# EAGLE board HapticSleeveSchematic4 (EAGLE 9.6.2)
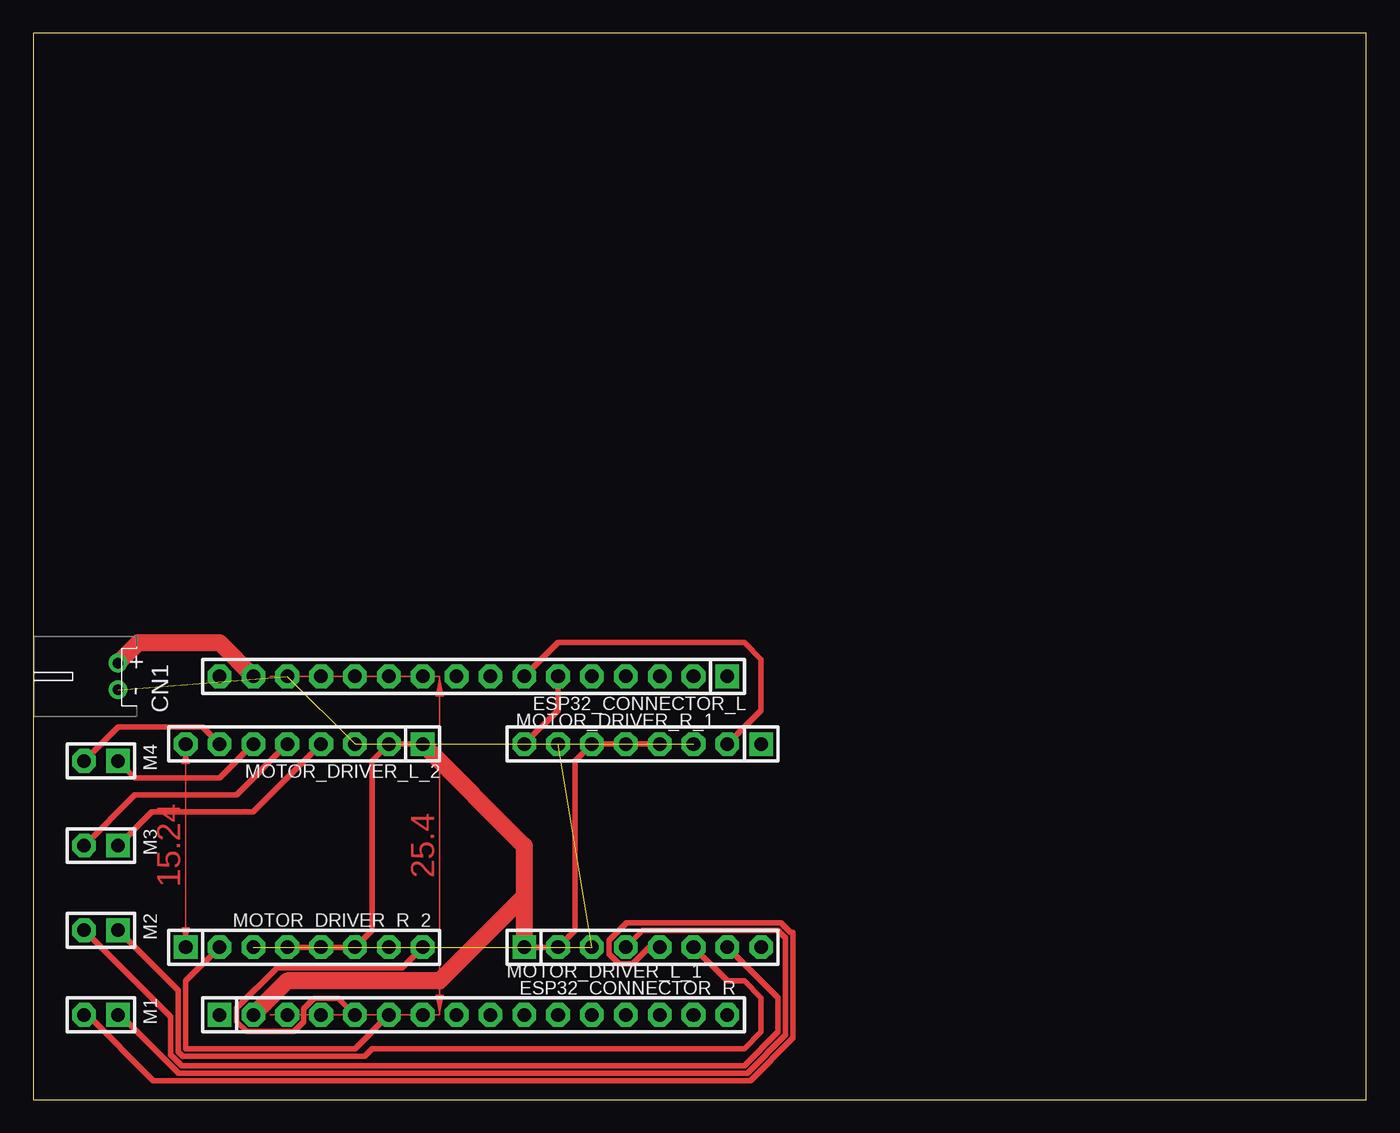
[diagram p0: board, top side]

Size 100 x 80 mm. Coordinates in mm from the lower left corner, seen from the top.
Outline: 0,0 100,0 100,80 0,80 0,0
Copper layers (1*16): Top 0.035mm / dielectric 1.5mm / Bottom 0.035mm
Design rules "default": minimum track width 6mil, minimum drill 0.35mm, track to track 6mil, track to pad 6mil, pad to pad 6mil, via to via 6mil, smd to smd 6mil, copper to edge 40mil, drill to drill 6mil, minimum pad ring 10mil, minimum via ring 8mil, stop-mask expansion 4mil, vias tented up to drill 0mil, thermal gap 10mil

## Footprints (pad centres in the part's own frame; a part is rotated, then mirrored left to right if it is on the bottom)
JST-PH-2-THM-RA = drill 0.8 pad 1.422: 1 1,0; 2 -1,0
SIP-100-16-40 = drill 1.016 pad 1.778 square: 1 -19.05,0 | drill 1.016 pad 1.778 octagon: 2 -16.51,0; 3 -13.97,0; 4 -11.43,0; 5 -8.89,0; 6 -6.35,0; 7 -3.81,0; 8 -1.27,0; 9 1.27,0; 10 3.81,0; 11 6.35,0; 12 8.89,0; 13 11.43,0; 14 13.97,0; 15 16.51,0; 16 19.05,0
SIP-100-02-40 = drill 1.016 pad 1.778 square: 1 -1.27,0 | drill 1.016 pad 1.778 octagon: 2 1.27,0
SIP-100-08-40 = drill 1.016 pad 1.778 square: 1 -8.89,0 | drill 1.016 pad 1.778 octagon: 2 -6.35,0; 3 -3.81,0; 4 -1.27,0; 5 1.27,0; 6 3.81,0; 7 6.35,0; 8 8.89,0

## Placement (x,y rotation side)
CN1  [JST-PH-2-THM-RA]  6.35,31.75 90 top
ESP32_CONNECTOR_L  F-1X16-SIP-100-40  [SIP-100-16-40]  33.02,31.75 180 top
ESP32_CONNECTOR_R  F-1X16-SIP-100-40  [SIP-100-16-40]  33.02,6.35 0 top
M1  F-1X02-SIP-100-40  [SIP-100-02-40]  5.08,6.35 180 top
M2  F-1X02-SIP-100-40  [SIP-100-02-40]  5.08,12.7 180 top
M3  F-1X02-SIP-100-40  [SIP-100-02-40]  5.08,19.05 180 top
M4  F-1X02-SIP-100-40  [SIP-100-02-40]  5.08,25.4 180 top
MOTOR_DRIVER_L_1  F-1X08-SIP-100-40  [SIP-100-08-40]  45.72,11.43 0 top
MOTOR_DRIVER_L_2  F-1X08-SIP-100-40  [SIP-100-08-40]  20.32,26.67 180 top
MOTOR_DRIVER_R_1  F-1X08-SIP-100-40  [SIP-100-08-40]  45.72,26.67 180 top
MOTOR_DRIVER_R_2  F-1X08-SIP-100-40  [SIP-100-08-40]  20.32,11.43 0 top

## Library data of the parts
CN1 = adafruit
ESP32_CONNECTOR_L ESP32_CONNECTOR_R M1-M4 MOTOR_DRIVER_L_1 MOTOR_DRIVER_L_2 MOTOR_DRIVER_R_1 MOTOR_DRIVER_R_2 = con-headers-jp-1

## Nets
3V3: ESP32_CONNECTOR_R.2 MOTOR_DRIVER_L_1.1 MOTOR_DRIVER_L_1.2 MOTOR_DRIVER_L_2.1 MOTOR_DRIVER_L_2.2 MOTOR_DRIVER_R_1.4 MOTOR_DRIVER_R_1.5 MOTOR_DRIVER_R_1.6 MOTOR_DRIVER_R_2.4 MOTOR_DRIVER_R_2.5 MOTOR_DRIVER_R_2.6
GND: CN1.2 ESP32_CONNECTOR_L.14 MOTOR_DRIVER_L_1.3 MOTOR_DRIVER_L_2.3 MOTOR_DRIVER_R_1.3 MOTOR_DRIVER_R_1.7 MOTOR_DRIVER_R_2.3 MOTOR_DRIVER_R_2.7
M1+: M1.1 MOTOR_DRIVER_L_1.4
M1-: M1.2 MOTOR_DRIVER_L_1.5
M2+: M2.1 MOTOR_DRIVER_L_1.6
M2-: M2.2 MOTOR_DRIVER_L_1.7
M3+: M3.1 MOTOR_DRIVER_L_2.4
M3-: M3.2 MOTOR_DRIVER_L_2.5
M4+: M4.1 MOTOR_DRIVER_L_2.6
M4-: M4.2 MOTOR_DRIVER_L_2.7
MOTOR1: ESP32_CONNECTOR_L.6 MOTOR_DRIVER_R_1.8
MOTOR2: ESP32_CONNECTOR_L.7 MOTOR_DRIVER_R_1.2
MOTOR3: ESP32_CONNECTOR_R.5 MOTOR_DRIVER_R_2.8
MOTOR4: ESP32_CONNECTOR_R.6 MOTOR_DRIVER_R_2.2
VCC: CN1.1 ESP32_CONNECTOR_L.15

## Tracks (layer width: path | path; a pad name or v marks a point on that pad's centre or on a via)
3V3
  Top 0.406: MOTOR_DRIVER_R_1.4 MOTOR_DRIVER_R_1.5 MOTOR_DRIVER_R_1.6 40.64,25.4 40.64,12.7 MOTOR_DRIVER_L_1.2 MOTOR_DRIVER_L_1.1 | MOTOR_DRIVER_L_2.1 MOTOR_DRIVER_L_2.2 25.4,25.4 25.4,12.7 MOTOR_DRIVER_R_2.6 MOTOR_DRIVER_R_2.5 MOTOR_DRIVER_R_2.4
  Top 1.27: MOTOR_DRIVER_L_2.1 36.83,19.05 36.83,15.24 | 36.83,15.24 MOTOR_DRIVER_L_1.1 | 36.83,15.24 30.48,8.89 19.05,8.89 ESP32_CONNECTOR_R.2
GND  (7 unrouted)
M1+
  Top 0.406: M1.1 6.52,6.35 10.89,1.98 53.57,1.98 56.44,4.85 56.44,11.43 56.44,11.99 56.44,12.14 55.88,12.7 45.72,12.7 MOTOR_DRIVER_L_1.4
M1-
  Top 0.406: M1.2 4.07,6.35 9,1.42 53.8,1.42 57,4.62 57,12.55 56.82,12.55 56.11,13.26 44.52,13.26 43.2,11.95 43.2,10.91 43.93,10.19 44.97,10.19 46.21,11.43 MOTOR_DRIVER_L_1.5
M2+
  Top 0.406: M2.1 10.87,8.18 10.87,3.58 11.2,3.25 24.84,3.25 25.4,3.81 53.34,3.81 54.61,5.08 54.61,7.62 53.34,8.89 52.07,8.89 MOTOR_DRIVER_L_1.6
M2-
  Top 0.406: MOTOR_DRIVER_L_1.7 55.88,7.62 55.88,5.08 53.34,2.54 11.12,2.54 10.31,3.35 10.31,6.2 M2.2
M3+
  Top 0.406: M3.1 8.89,21.59 16.51,21.59 MOTOR_DRIVER_L_2.4
M3-
  Top 0.406: M3.2 7.62,22.86 15.24,22.86 MOTOR_DRIVER_L_2.5
M4+
  Top 0.406: M4.1 7.62,24.13 13.97,24.13 MOTOR_DRIVER_L_2.6
M4-
  Top 0.406: M4.2 6.35,27.94 12.7,27.94 MOTOR_DRIVER_L_2.7
MOTOR1
  Top 0.406: ESP32_CONNECTOR_L.6 39.37,29.21 MOTOR_DRIVER_R_1.8
MOTOR2
  Top 0.406: ESP32_CONNECTOR_L.7 39.37,34.29 53.34,34.29 54.61,33.02 54.61,29.21 MOTOR_DRIVER_R_1.2
MOTOR3
  Top 0.406: MOTOR_DRIVER_R_2.8 27.66,9.88 18.28,9.88 15.27,6.87 15.27,5.83 15.99,5.11 19.57,5.11 20.3,5.83 20.3,6.82 21.07,7.59 22.89,7.59 ESP32_CONNECTOR_R.5
MOTOR4
  Top 0.406: MOTOR_DRIVER_R_2.2 11.43,8.89 11.43,3.81 24.13,3.81 ESP32_CONNECTOR_R.6
VCC
  Top 1.27: CN1.1 7.89,34.29 13.97,34.29 ESP32_CONNECTOR_L.15
(copper drawn outside any net)
  shapes: Top area x2